# Altium PCB LEOPARD_HD4.PcbDoc (part 3 of 3)
Units mil, origin at the board's own origin, x right, y up, seen from the top; angles counter-clockwise.
Board outline 2678.03 x 1898.03 mil, 4 copper layers (L1, L2, L3, L4), stack 207.302 mil thick; 147 components, 116 nets, 618 pads, 284 vias.
Unrouted connection lines stored in the file: 3.
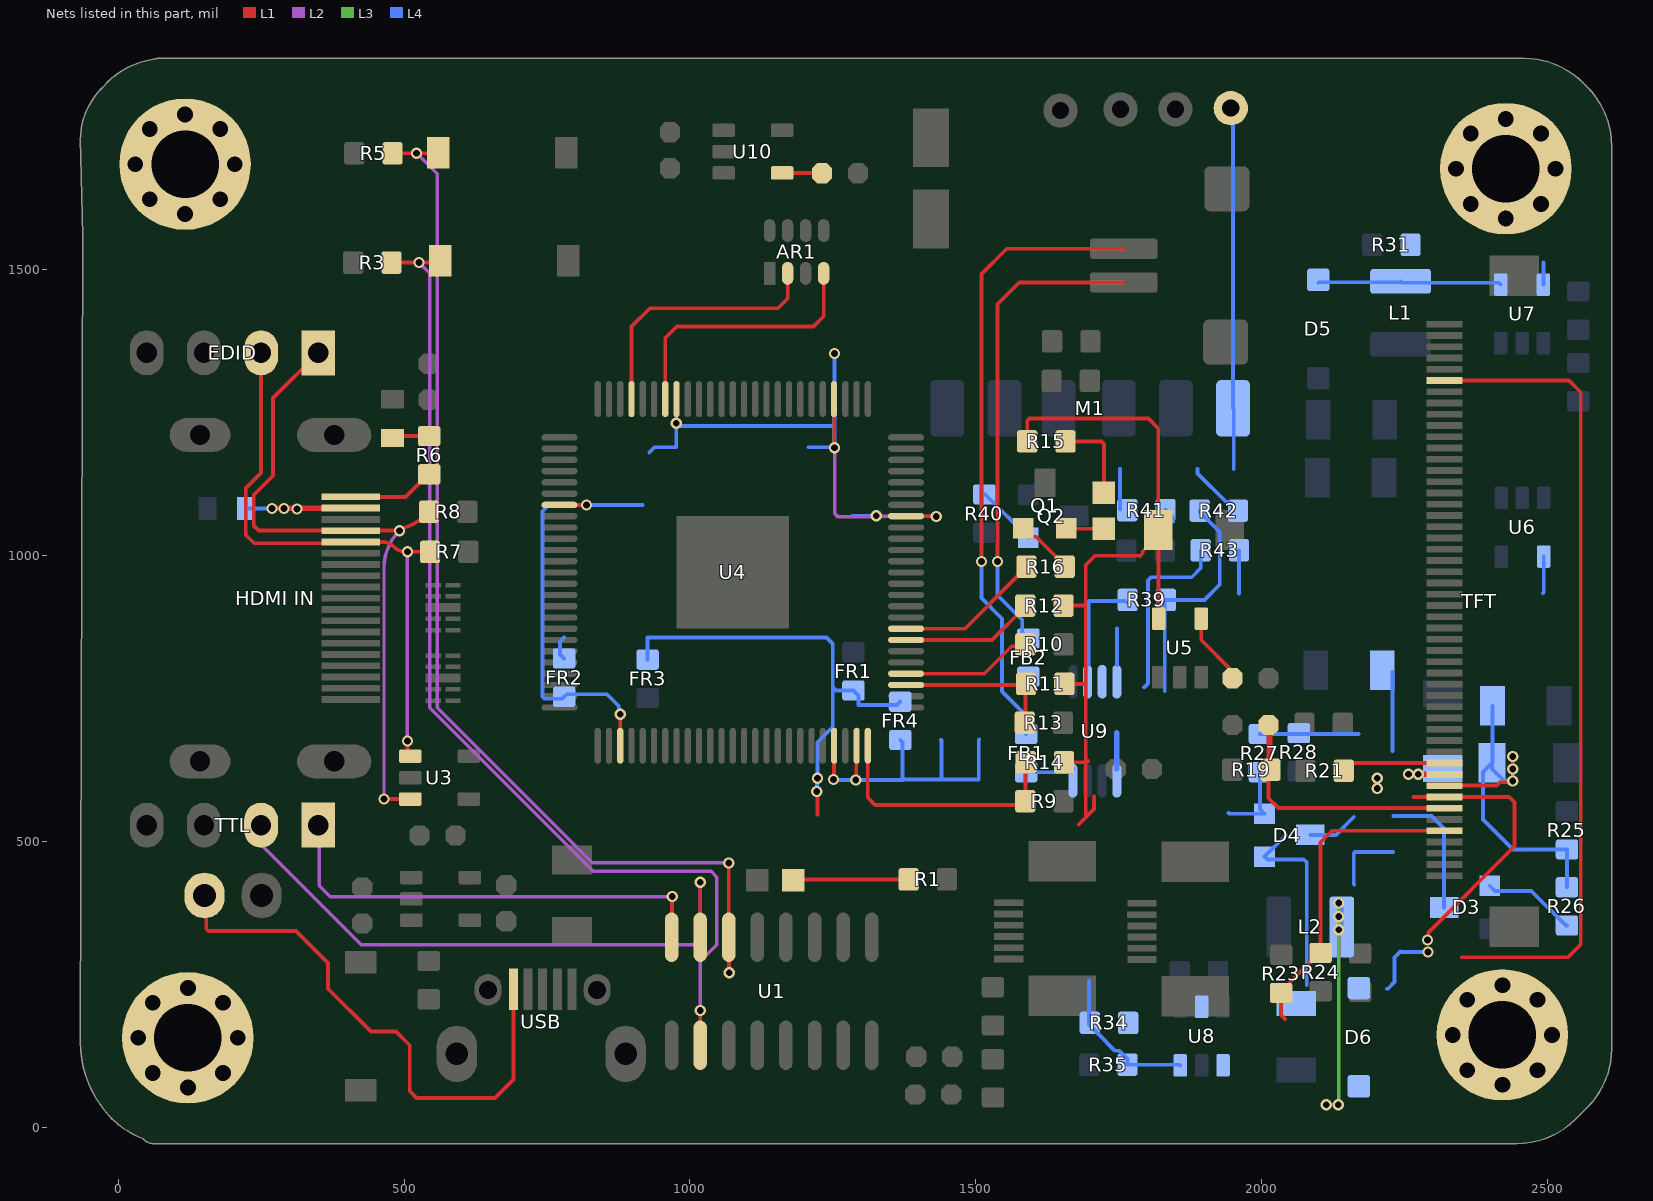
[diagram p5: the nets of this part, all layers, seen from the top]

## Via types
v1: diameter 19.68, hole 11.81, L1 to L4, tented both sides, 252 vias
v2: diameter 39.37, hole 27.56, L1 to L4, tented both sides, 32 vias

## Nets (pads, with @x,y where several pads share a name; then routed paths per layer and width w, separated by ;. In a path a pad name is that pad's centre, name@x,y a point inside that pad or via, vN(x,y) a via of type N, cw(c..) or ccw(c..) an arc to the next point about the centre after c; other vN are vias at no path point) (continued)
NetC13_1: C13.1 C14.1 C15.1 C16.1 C17.1 FR2.2 U4.18 U4.29 U4.43 U4.57 U4.78 | length 1874.3
  L1 w6.64: U4.57@771.85,1088.11 772.04,1087.92 819.08,1087.92 v1(819.28,1087.72) ; v1(878,722) 878.07,721.93 878.07,666.92 U4.78@878.15,666.85 ; v1@976,1226 976.29,1226.29 U4.43@976.29,1272.86 ; U4.29@1252.17,1273.15 1252.55,1272.76 1252.55,1188.45 v1(1253,1188) ; U4.18@1378.15,1068.43 1378.36,1068.21 1430.79,1068.21 v1(1431,1068)
  L2 w6: v1(1253,1188) 1253,1073 1259,1067 1324,1067 v1(1326,1069) 1326.5,1068.5 1430.5,1068.5 v1(1431,1068)
  L4 w6.64: v1(878,722) 875.5,724.5 875.5,736.5 C16.1@855,757 784.46,757 FR2.2@780,752.54 776.46,749 745.89,749 742,752.89 742,1077 752.72,1087.72 v1(819.28,1087.72) 858.71,1087.72 C17.1@859,1088.01 917.01,1088.01 ; 929,1179.99 938,1188.99 C14.1@976,1188.99 v1@976,1226 ; v1(976,1230.99) v1@976,1226 ; C15.1@1207,1188.99 1252.01,1188.99 v1(1253,1188) 1253,1226 ; v1(1253,1353) 1253,1226 ; C13.1@1284,1069 v1(1326,1069) ; v1@976,1226 1253,1226
NetC18_1: C18.1 C23.1 C24.1 C25.1 C26.1 FR4.2 U4.97 U4.99 | length 586
  L1 w6.64: v1@1252.08,608 1252.08,666.77 U4.97@1252.16,666.85 ; v1@1290.77,606 1290.77,666.08 U4.99@1291.53,666.85
  L4 w6.64: v1(1251,608) 1252.01,606.99 C18.1@1372,606.99 1372,608 ; FR4.2@1368,677.07 1372,673.07 1372,608 ; C26.1@1439,677.01 1440,676.01 C25.1@1440,608 ; C24.1@1506,678.01 1505,677.01 C23.1@1505,608 C25.1@1440,608 ; 1372,608 C25.1@1440,608
  other v1: 1290,607
NetC29_1: C29.1 U5.4 | length 126.8
  L1 w6.64: U5.4@1894.4,889.18 1894.4,851.6 1949,797 C29.1@1949,785
NetC33_1: C33.1 U6.4 | length 64.4
  L4 w6.64: C33.1@2492,934 2493.4,935.4 U6.4@2493.4,997.82
NetC37_2: C37.2 D3.1 R26.1 | length 163.8
  L4 w6.64: D3.1@2399,422 2408,413 2471.57,413 2532.03,352.54 R26.1@2534,352.54
NetC38_2: C38.2 D4.2 R27.2 | length 139.3
  L4 w6.64: C38.2@1942,549 1943,548 D4.2@2005,548 1997,556 R27.2@1997,620.54
NetC40_1: C40.1 C41.2 D6.2 L2.2 U8.1 | length 522.8
  L3 w6: v1(2134,39) 2134.5,39.5 2134.5,391.5 v1(2135,392)
  L4 w6.64: v1(2135,392) 2140.12,386.88 L2.2@2140.12,350 ; 2162,424 2161,425 C41.2@2161,479 2163.01,481.01 C40.1@2230,481.01
  other v1: 2113,39 2135,345 2135,368
NetC40_2: C40.2 D3.3 | length 236.1
  L4 w6.64: C40.2@2230,544 2297,544 2319,522 D3.3@2319,384
NetC41_1: C41.1 D4.3 | length 88.8
  L4 w6.64: D4.3@2085,511 2130.01,511 C41.1@2161,541.99
NetC46_1: C46.1 R34.1 R35.2 U8.3 | length 271.9
  L4 w6.64: C46.1@1698,256 1698,179 1712.64,164.35 1743.76,133.24 1751.07,133.24 1765.46,118.84 R35.2@1765.46,109 1856.42,109 U8.3@1857.6,107.82
NetC50_1: C50.1 R41.1 | length 71.2
  L4 w6.64: C50.1@1752.01,1151 1752.01,1080.53 R41.1@1752.54,1080
NetC51_1: C51.1 R39.2 U9.2 | length 177.1
  L4 w6.64: 1697,809.06 1697,918.01 C51.1@1698.99,920 1761.54,920 R39.2@1763.54,918
NetC52_1: C52.1 R42.1 | length 101.3
  L4 w6.64: C52.1@1888.01,1151 1888.01,1142.96 1937.91,1093.06 1944.15,1093.06 1950,1087.21 R42.1@1950,1079
NetC55_1: C55.1 U10.4 | length 70.1
  L1 w6.64: U10.4@1161.18,1668.6 1230.41,1668.6 C55.1@1231.01,1668
NetD5_2: D5.2 L1.1 U7.1 | length 322.5
  L4 w6.64: D5.2@2099,1476.53 2100.05,1477.58 2241.46,1477.58 L1.1@2243,1479.12 2245.63,1476.49 2414.88,1476.49 U7.1@2418,1473.36
"NetHDMI IN1_18": "HDMI IN.18" J2.1 | length 183.5
  L1 w6.64: v1(269,1082) v1@269.23,1082.23 ; 406.82,1082.23 407.05,1082.46
  L1 w10: v1@269.23,1082.23 406.82,1082.23
  L4 w6.64: J2.1@223.75,1082 v1(269,1082)
  other v1: 313,1081 290,1082
"NetHDMI IN1_19": "HDMI IN.19" R6.1 | length 153.3
  L1 w6.64: 407.05,1102.14 502.64,1102.14 542.03,1141.54 R6.1@544,1141.54
NetJ1_2: J1.2 R6.2 | length 66
  L1 w6.64: J1.2@480,1205.25 483.21,1208.46 R6.2@544,1208.46 R6.2@543.54,1208
NetLD1_2: LD1.2 R1.1 | length 202
  L1 w6.64: LD1.2@1180.99,432 1181.99,433 R1.1@1382.54,433
NetLD2_1: LD2.1 R15.2 | length 154.3
  L1 w6.64: R15.2@1656.93,1199 1720.11,1199 1724,1195.11 LD2.1@1724,1109.5
NetLD2_2: LD2.2 Q1.E | length 66.2
  L1 w6.64: Q1.E@1658,1047 1658.5,1046.5 LD2.2@1724,1046.5
NetQ1_B: Q1.B R16.2 | length 101.4
  L1 w6.64: Q1.B@1583,1047 1597.68,1032.32 1605.12,1032.32 1655.46,981.97 R16.2@1655.46,980
NetQ2_1: Q2.1 R40.2 | length 108.3
  L4 w6.64: R40.2@1515,1106.46 1516.54,1106.46 Q2.1@1592,1031
NetR31_1: R31.1 U7.3 | length 38.4
  L4 w6.64: U7.3@2492.8,1473.36 2492.8,1511.8
NetR39_1: R39.1 R42.2 U9.3 | length 404.7
  L4 w6.64: 1830.46,762.46 R39.1@1830.46,918 ; R39.1@1832.46,922 1900,922 1926.75,948.75 1926.75,1040.82 1891.54,1076.03 R42.2@1891.54,1078
NetR41_2: R41.2 R43.1 U9.4 | length 411.9
  L4 w6.64: U9.4@1747,808.28 1747,872 ; 1794,769 1801,776 1801,956 1806.68,961.68 1877.68,961.68 1893.28,977.28 R43.1@1893.28,1008.73 ; R41.2@1832,1079 1845.22,1065.78 1845.22,1058.76
NetUSB_1: USB.1 VCC_USB.1 | length 927.2
  L1 w6.64: VCC_USB.1@154,370 154,346.89 157.89,343 311,343 367,287 367,242 442,167 486,167 510,143 510,63 522,51 659,51 691.23,83.23 USB.1@691.23,241
OCK_INV: R9.2 R14.1 U4.100 | length 443
  L1 w6.64: U4.100@1311.22,666.85 1311.22,575.78 1324,563 1579.54,563 R9.2@1586.54,570 1587.04,570.5 1587.04,637.5 R14.1@1587.54,638
ODCK: AR1.4 U4.44 | length 474.6
  L1 w6.64: U4.44@956.89,1273.15 956.89,1379.89 977,1400 1216,1400 1233.99,1417.99 AR1.4@1233.99,1493
PIXS: R10.2 U4.4 | length 229.6
  L1 w6.64: U4.4@1378.15,792.84 1514.84,792.84 1562.75,840.75 1583.29,840.75 R10.2@1586.54,844
RIGHT: C52.2 M1.6 pad.2 | length 649.4
  L4 w6.64: pad.2@1950,1800 M1.6@1950,1257 1951,1256 C52.2@1951,1151
RST_LCD: C30.2 R19.2 TFT.44 | length 522.1
  L1 w6.64: R19.2@2015.46,625 2015.46,699.54 C30.2@2012,703 2012,575 2029.27,557.73 TFT.44@2319.54,557.73
RST_MCU: R5.2 RST.1 U1.6 | length 1880.1
  L1 w6.64: R5.2@479.93,1703 v1(522,1703) 559,1703 RST.1@560,1704 ; v1(1068,462) U1.6@1068,331.98 1068.5,331.48 1068.5,270.5 v1(1069,270)
  L2 w6: v1(522,1703) 558,1667 558,733 829,462 v1(1068,462)
RX_MCU: TTL.1 U1.8 | length 803.1
  L1 w6.64: U1.8@968,331.98 968.5,332.48 968.5,402.5 v1(969,403)
  L2 w6: TTL.1@350,528 352,526 352,422 371,403 v1(969,403)
SCDT: R16.1 U4.8 | length 256.1
  L1 w6.64: U4.8@1378.15,871.57 1480.98,871.57 1573.04,963.63 1573.54,963.63 1588.54,978.63 R16.1@1588.54,980
SCL: "HDMI IN.15" EDID.2 R7.1 U3.1 | length 1023.2
  L1 w6.64: EDID.2@250,1354 250,1144 223,1117 223,1036 238,1021 404.65,1021 407.05,1023.4 461.72,1023.4 cw(c461.72,994.72) 482,1015 ccw(c503.73,1036.73) 503.73,1006 v1(506,1006) R7.1@545.54,1006 ; v1(506,675) 506,653.22 U3.1@510.82,648.4
  L2 w6: v1(506,675) v1(506,1006)
SDA: "HDMI IN.16" EDID.1 R8.1 U3.3 | length 1190.9
  L1 w6.64: EDID.1@350,1354 271,1275 271,1139 237,1105 237,1052 245.91,1043.09 407.05,1043.09 469.21,1043.09 ccw(c469.21,1143.09) 539.92,1072.38 R8.1@543.54,1076 ; v1(465,573.6) U3.3@510.82,573.6
  L2 w6: v1(465,573.6) 465,977.69 cw(c557.5,977.69) v1(492.09,1043.09)
SHIELD: H1.P H2.P H3.P H4.P
  other v2: 122,69 2421,74 60.48,94.48 183.52,94.48 2359.48,99.48 2482.52,99.48 35,156 209,156 2334,161 2508,161 60.48,217.52 183.52,217.52 2359.48,222.52 2482.52,222.52 122,243 2421,248 2427,1589 117,1597 2365.48,1614.48 2488.52,1614.48 55.48,1622.48 178.52,1622.48 2340,1676 2514,1676 30,1684 204,1684 2365.48,1737.52 2488.52,1737.52 55.48,1745.52 178.52,1745.52 2427,1763 117,1771
SP1+: FB2.2 | length 843.6
  L1 w6.64: v1(1538,989) 1538,1439 1576,1477 1759,1477
  L4 w6.64: v1(1538,989) 1538,930 1581.24,886.76 1581.24,865.22 FB2.2@1592,854.46
SP1-: FB1.2 | length 1104.1
  L1 w6.64: v1(1510,989) 1510,1492 1554,1536 1759,1536
  L4 w6.64: v1(1510,989) 1510,925 1546,889 1546,762 1588,720 FB1.2@1588,687.46
SPK1+: FB2.1 R43.2 U9.5 | length 137.3
  L4 w6.64: 1960.21,933.21 R43.2@1960.21,1008.73
  L4 w10: U9.5@1746.38,627.21 1746.38,689
SPK1-: FB1.1 U9.8 | length 85.8
  L4 w6.64: FB1.1@1588,620.54 1665.44,620.54 1670,625.09 U9.8@1670,627
ST: R11.1 R13.2 U4.3 | length 277.9
  L1 w6.64: U4.3@1378.15,773.15 1586.15,773.15 R11.1@1588,775 ; R13.2@1585.54,707 1586.77,708.23 R11.1@1586.77,773.77
STAGE: R12.2 U4.7 | length 240.2
  L1 w6.64: U4.7@1378.15,851.89 1528.39,851.89 1586.54,910.03 R12.2@1586.54,912 R12.2@1582.43,907.89
SW1: OFF/ON.2 R3.2 U1.10 | length 1810.8
  L1 w6.64: R3.2@477.93,1512 v1(526,1512) 567,1512 OFF/ON.2@570,1515 ; U1.10@1018,143 v1(1018,204)
  L2 w6: v1(526,1512) 545,1493 545,733 831,447 1037,447 1047,437 1047,319 1018,290 v1(1018,204)
TX_MCU: TTL.2 U1.7 | length 1073.1
  L1 w6.64: U1.7@1018,331.98 v1(1018,428)
  L2 w6: TTL.2@250,494 425,319 1007,319 1018,330 v1(1018,428)
  L2 w6.64: TTL.2@250,494 TTL.2@250,528
U/D: R21.1 TFT.40 | length 181.7
  L1 w6.64: R21.1@2143.46,623 2156.94,636.47 TFT.40@2319.54,636.47
VCC10.4: C46.2 C47.1 C48.1 D4.1 D6.1 R34.2 TFT.43 U8.5 | length 953.6
  L1 w6.64: 2265.58,577.42 TFT.43@2319.54,577.42 2432.58,577.42 2442,568 2442,491 2291.51,340.51 2291.51,328.51 v1(2290,327)
  L4 w6.64: 2042,510 D4.1@2005,473 2010,468 2073.73,468 2079,462.73 2079,248.36 ; 2219,242 2220.73,242 2232.36,253.64 2232.36,296.36 C47.1@2243,307 2244,306 v1(2291,306)
  other v1: 2202,592 2202,610
VCC16: C36.2 C39.1 DZ2.2 R27.1 R28.2 TFT.41 | length 373.1
  L1 w10: v1(2257,617) 2257.11,616.89 2319.44,616.89 TFT.41@2319.54,616.79
  L4 w6.64: R27.1@1997,687.46 2169.54,687.46 ; 2228.87,657.87 C39.1@2228.87,795.81
  other v1: 2274,617
VCC-7: C34.2 C35.2 DZ1.1 R25.2 R26.2 TFT.42 | length 661.9
  L1 w6.64: TFT.42@2319.54,597.1 2319.99,597.55 2411.16,597.55 2416.56,602.96 2436.96,602.96 v1(2439,605) ; v1(2439,626) v1(2439,648)
  L4 w6.64: C35.2@2403.72,736.81 2403.72,637.72 DZ1.1@2403,637 ; v1(2439,626) v1(2439,605) 2438.13,605.87 2423.3,605.87 2403,626.17 DZ1.1@2403,637 ; R26.2@2534,419.46 R25.2@2534,485.54 2439.46,485.54 2387,538 2387,621 DZ1.1@2403,637
VCOM: R23.2 R24.2 TFT.6 TFT.46 | length 1997.6
  L1 w6.64: 2041,189 2034,196 R23.2@2034,234.54 2035.37,234.54 2049.68,248.85 2049.68,253.11 2101.03,304.46 R24.2@2103,304.46 2103,498 2123.36,518.36 TFT.46@2319.54,518.36 ; TFT.6@2319.54,1305.77 2537.23,1305.77 2558,1285 2558,319 2536,297 2350,297
VDD: C27.1 FR1.1 FR2.1 FR3.1 FR4.1 R11.2 R12.1 R14.2 R15.1 U5.5 | length 2249.5
  L1 w6.64: 1223,546 v1@1223,587 ; R15.1@1590,1199 1590,1235.11 1593.89,1239 1802,1239 1819,1222 C27.1@1819,1044 ; R12.1@1653.46,912 1692.23,912 ; R14.2@1654.46,638 1692.23,638 ; R11.2@1654.93,775 1692.23,775 ; 1680,529 1707,556 1707,578 ; 1692.23,542.23 1692.23,638 ; 1696,640 1694,638 1692.23,638 ; U5.5@1819.6,889.18 1819.6,1043.4 C27.1@1819,1044 ; 1692.23,638 1692.23,775 ; 1692.23,775 1692.23,912 ; 1692.23,912 1692.23,983.23 1708,999 1787,999 1787.25,998.75 1791.94,1003.44 1791.94,1006.94 1819,1034 C27.1@1819,1044
  L4 w6.64: FR2.1@780,819.46 773,826.46 773,849 780,856 ; FR3.1@926,817.46 926,856 1239,856 1250,845 1250,768.81 ; v1(1222,587) 1222.5,587.5 1222.5,609.5 v1(1223,610) 1223,673 1250,700 1250,768.81 ; FR4.1@1368,744 1362,738 1294.89,738 1294.89,754.65 FR1.1@1286,763.54 1255.27,763.54 1250,768.81
VSY: AR1.2 U4.47 | length 464.2
  L1 w6.64: U4.47@897.84,1273.15 897.84,1399.84 930,1432 1154,1432 1171,1449 AR1.2@1171,1493
pads on no net: "HDMI IN.13" "HDMI IN.14" D5.0 D6.0 FB1.0 FB2.0 FR1.0 FR2.0 FR3.0 FR4.0 L1.0 L2.0 M1.1 M1.2 R1.0 R2.0 R3.0 R5.0 R6.0 R7.0 R8.0 R9.0 R10.0 R11.0 R12.0 R13.0 R14.0 R15.0 R16.0 R17.0 R18.0 R19.0 R20.0 R21.0 R22.0 R23.0 R24.0 R25.0 R26.0 R27.0 R28.0 R29.0 R31.0 R32.0 R33.0 R34.0 R35.0 R36.0 R37.0 R38.0 R39.0 R40.0 R41.0 R42.0 R43.0 SPK.1 SPK.2 SPK.3 TFT.45 TFT.49 TFT.50 TFT.51 TFT.52 TP1.7 TP1.8 TP2.7 TP2.8 U2.0 U3.0 U4.2 U4.9 U4.40 U4.41 U4.42 U4.49 U4.50 U4.51 U4.52 U4.53 U4.54 U4.55 U4.56 U4.59 U4.60 U4.61 U4.62 U4.63 U4.64 U4.65 U4.66 U4.69 U4.70 U4.71 U4.72 U4.73 U4.74 U4.75 U4.77 U4.96 U5.0 U6.0 U7.0 U8.0 U10.0 USB.4
copper on no net: | length 29
  L1 w30: 1908,218 1911,218 1919,218 ; 1911,226 1917,226 ; 1933,1373 1937,1373 ; 1935,1641 1939,1641 ; 1939,1631 1940,1631 ; 1939,1654 1942,1654

## Polygon pours and split planes (outlines as drawn)
GND on L4 "GND_L04_P000" (solid, remove dead copper, pour order 0): 2577,1731 2577,130.42 cw(c2477,130.42) 2547.71,59.71 2515.29,27.29 cw(c2444.58,98) 2444.58,-2 97.42,-2 cw(c97.42,98) 26.71,27.29 -30,84 cw(c11.04,125.04) -47,125.04 -47,1717.58 cw(c53,1717.58) -17.71,1788.29 27,1833 cw(c58.38,1801.62) 58.38,1846 2457.58,1846 cw(c2457.58,1746) 2528.29,1816.71 2570,1775 cw(c2553.1,1758.1) 2577,1758.1 2577,1730
GND on L2 "GND_L02_P001" (solid, remove dead copper, pour order 1): 2582,1719.69 2582,119.11 cw(c2482,119.11) 2552.71,48.4 2520.29,15.98 cw(c2449.58,86.69) 2449.58,-13.31 102.42,-13.31 cw(c102.42,86.69) 31.71,15.98 -25,72.69 cw(c16.04,113.73) -42,113.73 -42,1706.27 cw(c58,1706.27) -12.71,1776.98 32,1821.69 cw(c63.38,1790.31) 63.38,1834.69 2462.58,1834.69 cw(c2462.58,1734.69) 2533.29,1805.4 2575,1763.69 cw(c2558.1,1746.79) 2582,1746.79 2582,1718.69
GND on L3 "GND_L03_P002" (solid, remove dead copper, pour order 2): 2570.6,1713.38 2570.6,112.8 cw(c2470.6,112.8) 2541.31,42.09 2508.89,9.67 cw(c2438.18,80.38) 2438.18,-19.62 91.02,-19.62 cw(c91.02,80.38) 20.31,9.67 -36.4,66.38 cw(c4.64,107.42) -53.4,107.42 -53.4,1699.96 cw(c46.6,1699.96) -24.11,1770.67 20.6,1815.38 cw(c51.99,1783.99) 51.99,1828.38 2451.18,1828.38 cw(c2451.18,1728.38) 2521.89,1799.09 2563.6,1757.38 cw(c2546.7,1740.48) 2570.6,1740.48 2570.6,1712.38
GND on L1 "GND_L01_P003" (hatched 45Degree grid 25 track 8, remove dead copper, pour order 3): 2568,1700.69 2568,100.11 cw(c2468,100.11) 2538.71,29.4 2506.29,-3.02 cw(c2435.58,67.69) 2435.58,-32.31 88.42,-32.31 cw(c88.42,67.69) 17.71,-3.02 -39,53.69 cw(c2.04,94.73) -56,94.73 -56,1687.27 cw(c44,1687.27) -26.71,1757.98 18,1802.69 cw(c49.38,1771.31) 49.38,1815.69 2448.58,1815.69 cw(c2448.58,1715.69) 2519.29,1786.4 2561,1744.69 cw(c2544.1,1727.79) 2568,1727.79 2568,1699.69

## Keep-outs
Keep-Out Layer:
  lines w5: -60,1698.45 cw(c105.18,1696.2) 115.1,1861.1 2441.35,1861.1 cw(c2439.1,1695.92) 2604,1686 ; -59,140.45 -59,1699.45 ; -59,155.45 ccw(c105.9,145.53) 103.65,-19.65 ; 103.65,-19.1 2349.1,-19.1 2408.1,-19.1 cw(c2408.2,-19.1) 2408.2,-19 2429,-19 ccw(c2438.92,145.9) 2604.1,143.65 2604.1,1692.1

## Other copper
L1:
  rectangle net 3V3M: 1437,362 1481,382
  rectangle net GND: 1962,1374 1990,1391
  rectangle net GND: 1883,1362 1921.89,1384
  rectangle net GND: 1812.14,202 1840,247.73
  rectangle net GND: 1861.42,179 1928,232.48
  rectangle net GND: 1635,415 1662,452
  rectangle net GND: 1868,414 1900,454
  rectangle net GND: 1576,449 1959,476
  rectangle net GND: 1921.89,1362 1947,1425.69
  rectangle net GND: 1928,1586 1952,1693
  rectangle net GND: 1884.34,1628 1993,1661.11
  rectangle net GND: 2423,1439 2459,1538
  rectangle net GND: 2384,1470 2500,1507
  rectangle net 3V3M: 1254,0 1409,191
  rectangle net SW1: 453,1478 612,1557
  rectangle net RST_MCU: 454.58,1655 613,1742.06
  rectangle net "NetHDMI IN1_18": 257,1057 345,1110
  rectangle net NetC40_1: 2122,334 2149,407
  rectangle net NetC40_1: 2066,23 2225,79
  rectangle net VDD: 1636,623 1699,653
  rectangle net NetLD2_2: 1634,1027 1746,1070
  rectangle net VDD: 1635.75,891 1707,939.56
  rectangle net VDD: 1641.15,755 1692,798.62
  rectangle net 5.0V: 2015,291.62 2053.69,408
  region net 3V3M: 1800,375 1824,375 1830,381 1876,381 1981,276 1981,186 2044,123 2044,8 2028,-8 1552.81,-8 1552.81,74 2014,74 2025,85 2025,120 1967,178 1967,259 1863,363 1827,363 1821,369
  region net 5.0V: 214,467 214,378 227,365 360,365 394,399 450,399 450,435 413,472 219,472
  region net NetUSB_1: 109,357 133,333 299,333 347,285 347,148 390,105 468,105 487,86 487,44 513,18 685,18 707,40 707,195 694,208 689,208 679,198 679,95 644,60 549,60 526,83 526,171 491,206 404,206 381,229 381,311 344,348 215,348 192,371 192,453 180,465 113,465 109,461
  region net 3V3M: -49,364 -49,338 -7,296 231,296 287,240 287,46 345,-12 1556,-12 1565,-3 1565,61.81 1552.81,74 1515.06,74 1506.38,65.32 1508,63.69 1508,20 1497,9 1424,9 1416,17 1416,148 1425,157 1546,157 1550,161 1550,187 1546,191 1395,191 1360.5,156.5 1360.5,17.5 1346,3 408,3 335,76 335,272 289,318 78,318 37.4,358.6
  region net 4.2V: 1138,1799 1138,1720 1146,1712 1348,1712 1396,1664 1653,1664 1684,1695 1684,1799 1663,1820 1159,1820
  region net 5.0V: 1078,1804 1102,1804 1119,1787 1119,1657 1106,1644 1044,1644 1037,1651 1037,1677 1041,1681 1095,1681 1099,1685 1099,1715 1086,1728
  region net 5.0V: 809,1459 830,1459 852,1481 852,1753 903,1804 1078,1804 1100.6,1781.4 1100.6,1742.6 1086,1728 944,1728 913,1697 913,1468 846,1401 835,1390
  region net 3V3M: 833,1816 833,1493 819,1479 742,1479 732,1489 732,1755 705,1782 375,1782 330,1737 330,1531 289,1490 17,1490 -17,1456 -17,661 83.1,560.9 83.1,296 -34,296 -49,311 -49,1491 -10,1530 227,1530 295,1598 295,1801 326,1832 817,1832
  region net 3V3M: 594,447 594,427 603,418 637,418 641,422 641,443 655,457 734,457 761,430 859,430 886,403 886,271 930,227 1222,227 1254,195 1254,81 1261,74 1279,74 1292,87 1292,186 1238,240 959,240 911,288 911,460 836,535 682,535
  region net 5.0V: 408,407 416,399 450,399 471,420 539,420 545,414 545,376 541,372 494,372 487,365 487,342 494,335 566,335 581,350 581,455 613,487 605,495 569,495 546,472 413,472 408,467 413,472 408,467
  region net 5.0V: 596.65,1128.35 713,1012 713,587 613,487 577,487 569,495 569,574 584,589 630,589 685,644 685,951 596.77,1039.23
  region net 5.0V: 1783,807 1783,827 1796,840 1886,840 1908,818 1908,768 1904,764 1886,764 1882,768 1882,809 1869,822 1840,822 1831,813
  region net VDD: 1571,1237 1571,1183 1576,1178 1577.31,1179.31 1607.72,1179.31 1614,1185.6 1614,1216 1627,1229 1743,1229 1769,1203 1769,1022 1757,1010 1701,1010 1681,990 1681,531 1710,560 1710,858 1720,868 1721,867 1828,867 1828,1000 1849,1021 1849,1230 1831,1248 1582,1248
  region net VCC10.4: 2174,585 2187,572 2303,572 2303,582 2302,583 2274,583 2251,583 2213,621 2176,621 2174,619
  region net 3V3L: 2148.38,250.32 2148.38,218.62 2158,209 2243,209 2329,295 2329,308 2321,308 2267.25,254.25 2152.31,254.25
  region net 3V3L: 2367,1233 2374,1226 2419,1226 2458,1265 2494,1265 2515,1244 2515,529 2388,402 2520,402 2546,428 2546,1277 2528,1295 2370,1295 2367,1292
  region net 5.0V: 561,1307 645.11,1307 664,1288.11 664,984 600.31,984 595,989.31 595,1225 569,1251
  region net 5.0V: 13,1412 13,1330 32,1311 68,1311 91,1334 91,1393 114,1416 418,1416 460,1374 460,1257.75 466.75,1251 569,1251 576,1258 576,1292 561,1307 516,1307 499,1324 499,1388 502,1391 503,1390 835,1390 835,1459 60,1459
  region net VDD: 1207,548 1238,517 1689,517 1710,538 1710,560 1702,560 1674,532 1257,532 1233,556 1233,617 1228,622 1209,622 1207,620
  region net 5.0V: 1831,813 1831,568 1849,550 2010,550 2067,493 2067,297.06 2051.94,282 2024.62,282 2010,296.62 2010,482 1971,521 1810,521 1783,548 1783,807 1792,816 1828,816
  region net SP1+: 1825,1462 1819,1456 1574,1456 1547,1429 1547,984 1543,980 1531,980 1528,983 1528,1456 1576,1504 1814,1504 1825,1493
  region net SP1-: 1826,1559 1826,1527 1816,1517 1563,1517 1521,1475 1521,984 1517,980 1504,980 1501,983 1501,1502 1560,1561 1824,1561
  region net 4.2V: 1842,979 1842,960 1848,954 1917,954 1935,936 1935,834 1940,829 1963,829 1969,835 1969,972 1953,988 1851,988
  region net BL_VCC: 2220,1405 2246,1379 2370,1379 2384,1393 2384,1413 2376,1421 2300,1421 2281,1440 2281,1678 2272,1687 2223,1687 2220,1684
  region net BL_GND: 2304,1370 2237,1370 2208,1399 2208,1673 2205,1676 2159,1676 2155,1672 2155,1651 2163,1643 2174,1643 2180,1637 2180,1314 2184,1310 2254,1310 2258,1314 2258,1336 2262,1340 2304,1340
  region net VCOM: 2010.38,248.32 2010.38,191.62 2027,175 2240,175 2365,300 2348,300 2235,187 2065,187 2053,199 2053,246.37 2047.37,252 2014.06,252
  region net VCC-7: 2350,603 2378,603 2393,618 2393,660 2405,672 2452,672 2457,667 2457,599 2449,591 2350,591
  region net VCC10.4: 2260,308 2272,296 2294,296 2310,312 2310,349 2461,500 2461,567 2445,583 2350,583 2350,572 2406,572 2424,554 2424,488 2334,398 2265,398 2260,393
L2:
  rectangle net 5.0V: 2005,329 2063,420
  rectangle net VCC10.4: 2257,270 2324,351
  rectangle net VCC-7: 2411,575 2469,675
  rectangle net VCC16: 2236,582 2292,645
  rectangle net VCC10.4: 2179,566 2226,636
  rectangle net NetC40_1: 2087,20 2157,55
  rectangle net NetC40_1: 2121,333 2149,410
  rectangle net 3V3L: 2349,1208 2414,1299
  rectangle net BL_GND: 2175,1290 2250,1331
  region: 1053,1172.76 923,1172.76 923,848 1347.84,848 1347.84,812 897,812 897,871.16 800,871.16 800,917 895,917 895,1206 1053,1206
  region net 3V3M: 1481,365 1475,359 1437,359 1430,366 1430,395 1433,398 1480,398 1481,397
  region net BL_VCC: 2281,1442 2304,1419 2393,1419 2393,1378 2384,1378 2256,1378 2235,1399 2235,1663 2241,1669 2279,1669 2281,1667
  region net 4.2V: 1835,993 1872,993 1969,896 1969,832 1961,824 1935,824 1928,831 1928,860 1833,955 1833,991
L3:
  rectangle net VCC10.4: 2261,275 2320,357
  rectangle net 5.0V: 2004,312 2060,415
  rectangle net VCC16: 2236,565 2297,650
  rectangle net VCC10.4: 2173,564 2227,650
  rectangle net VCC-7: 2412,572 2472,676
  rectangle net 3V3L: 2363,1222 2405,1298
  rectangle net BL_VCC: 2353,1388 2389,1422
  region net NetC40_1: 2177,407 2177,38 2159,20 2097,20 2089,28 2089,415 2095,421 2173,421 2177,418
  region net 4.2V: 1959,830 1947,818 1821,818 1810,829 1810,1000 1825,1015 1956,1015 1959,1012 1956,1015 1959,1012
L4:
  rectangle net NetC46_1: 1681,161.04 1715.96,277
  rectangle net NetC8_1: 1015,1164 1168,1207
  rectangle net EN_BLK: 1838,191 1870,290
  rectangle net 4.2V: 1615,1203 1684,1819
  rectangle net LEFT: 1818,1309 1884,1819
  rectangle net RIGHT: 1909,1257 1980,1819
  rectangle net NetC46_1: 1747.75,71 1873,136.56
  rectangle net VCC10.4: 1884,160 1907,232
  rectangle net BL_VCC: 2227,1583 2283,1818
  rectangle net BL_GND: 2153,1515.44 2215,1818
  rectangle net NetC33_1: 2476,912 2522,1025
  region net NetR31_1: 2339.04,1521 2465,1521 2479,1507 2479,1457 2481,1455 2504,1455 2504,1509 2470,1543 2335.34,1543
  region net 5.0V: 213,448 213,342 262,293 322,293 347,268 347,50 406,-9 2246,-9 2268.67,13.67 565.33,13.67 495,84 495,405 442,458 223,458
  region net 3V3M: 1481,399 1481,362 1478,359 1432,359 1427,364 1427,398 1433,404 1478,404 1481,401
  region net NetC13_1: 994,1242 1221,1242 1243,1264 1243,1357 1249,1363 1261,1363 1264,1360 1264,1178 1251,1165 1192,1165 1187,1170 1187,1210 1182,1215 1001,1215 992,1206
  region net NetC13_1: 872,1109 897,1109 906,1118 906,1219 929,1242 994,1242 1000,1236 1000,1166 991,1157 958,1157 930,1129 930,1070
  region net NetC13_1: 888,765 888,711 878,701 752,701 733,720 733,1091 751,1109 920,1109 930,1099 930,1070 910,1050 771,1050 749,1028 749,789.44 762.44,776 877,776
  region net NetC8_1: 1193,926 1193,885 1201,877 1255,877 1266.31,865.69 1266.31,816.69 1274,809 1336,809 1352,825 1352,893 1317,928 1195,928
  region net NetC18_1: 1241,598 1256,583 1515,583 1527,595 1527,686 1516,697 1289,697 1241,649 1241,628
  region net VDD: 761,859 761,803 764,800 765,801 806.81,801 816,810.19 816,832 833,849 879,849 902,826 902,804.06 908.06,798 951.81,798 958,804.19 958,833 974,849 1232,849 1245,836 1245,712 1210,677 1210,583 1216,577 1228,577 1234,583 1234,655 1299,720 1381.4,720 1391.62,730.22 1391.62,784.38 1383,793 1262.44,793 1256,799.44 1256,853 1246,863 765,863
  region net AVDD: 1234,778 1234,717 1215,698 918,698 907,709 907,764 912,769 912.75,768.25 979.25,768.25 991,780 1232,780
  region net "NetHDMI IN1_18": 204,1141 204,1046 209,1041 332,1041 338,1047 338,1137 329,1146 209,1146
  region net 5.0V: 16,1059 34,1041 167,1041 167,1139 160,1146 106,1146 76,1176 76,1399 19,1399 16,1396
  region net 5.0V: 1909.69,294.62 1909.69,252.32 1921,241 1921,190 1922,190 1925,187 1969,187 1984,202 1984,262 2002,280 2006,276 2035,276 2050,291 2050,310 2042,318 2021,297 1912.06,297
  region net 5.0V: 1944,442 1955,442 1982,415 2040.67,415 2051,404.67 2051,301 2049,299 2047,301 2010,301 2010,334 2001,343 1946,343
  region net 5.0V: 1916,442 1944,442 1957,429 1957,342 1944,329 1915,329 1907,337 1907,406 1894,419
  region net NetR31_1: 2242.75,1570.56 2286,1571 2333.04,1571 2361.04,1543 2339.04,1521 2248.31,1521 2246.69,1519.38 2242.75,1523.31
  region net SP1-: 1499,890 1551,838 1557,844 1557,884 1520,921 1520,995 1515,1000 1500,1000 1499,999
  region net SP1+: 1526,999 1526,929 1572,883 1572,840 1580,832 1614.81,832 1625,842.19 1625,866 1567,924 1567,987 1554,1000 1527,1000
  region net SP1-: 1569,761 1557,773 1557,884 1547,894 1547,761
  region net SP1-: 1616,670.19 1608.81,663 1567.19,663 1555,675.19 1555,685 1567.19,697.19 1567.19,735.81 1542,761 1569,761 1616,714 1616,706
  region net SPK1-: 1678,668 1678,578 1660,560 1573,560 1563,570 1563,639 1569,645 1628,645 1652,669 1677,669
  region net NetC38_2: 2024,634.32 2024,531 2022,529 1935,529 1923,541 1923,616 1941.32,634.32
  region net 4.2V: 1714,599 1714,545 1703,534 1703,502 1723,482 1835,482 1862,509 1862,645 1966,749 1966,867 1959,874 1935,874 1927,866 1927,749 1842,664 1842,570 1841,570 1803,532 1742,532 1729,545 1729,604
  region net 4.2V: 1615,1177.5 1712,1080.5 1712,1141 1684,1169 1684,1335 1670,1349 1619,1349 1615,1345
  region net NetC51_1: 1783.25,949.56 1783.25,902.31 1776.94,896 1726,896 1698,868 1682,884 1682,942 1700,960 1772.81,960
  region net CTRL: 1786,1021 1786,985.19 1773.81,973 1693,973 1673,953 1668,953 1668,1030 1647,1051 1647,1088 1651,1092 1691,1092 1695,1088 1697,1088 1697,1067 1696,1066 1696,1034 1701,1029 1778,1029
  region net NetR41_2: 1814.28,1106.56 1814.28,1051.44 1822.72,1043 1848,1043 1888,1003 1888,987 1866,965 1810,965 1798,953 1798,948.56 1802.44,953 1888,953 1910,975 1910,1021.54 1901.54,1030 1875,1030 1851,1054 1851,1099 1843,1107 1814.72,1107
  region net NetR41_2: 1739,758 1745,752 1792,752 1805,765 1805,909 1778,882 1743,882 1739,878
  region net NetR39_1: 1714,774 1714,736 1720,730 1840,730 1872,762 1872,877 1931,936 1931,982 1892,943 1820,943 1814,937 1814.75,936.25 1814.75,754.72 1802.03,742 1733,742 1728,747 1728,774
  region net SPK1+: 1979,942 1912,875 1912,752 1841,681 1663,681 1572.31,771.69 1572.31,810.31 1576,814 1602.94,814 1624,792.94 1624,742 1671,695 1837,695 1898,756 1898,881 1941,924 1941,1026.92 1947.08,1033 1976,1033 1979,1030
  region net NetR39_1: 1868,1060 1887,1041 1909,1041 1926,1024 1931,1024 1931,1048 1910,1069 1910,1096.94 1904.94,1102 1872,1102 1868,1098
  region net NetC52_1: 1868,1172 1868,1120 1879,1109 1911,1109 1936,1084 1936,1064 1944.69,1055.32 1944.69,1054.38 1971.62,1054.38 1972,1054 1976,1058 1976,1100 1971,1105 1945,1105 1912,1138 1912,1164 1900,1176 1872,1176
  region net RIGHT: 1976,1318 1976,1135 1968,1127 1938,1127 1928,1137 1928,1196 1910,1214 1910,1305 1923,1318
  region net LEFT: 1884,1205 1838,1159 1838,1135 1825,1122 1798,1122 1791,1129 1791,1166 1818,1193 1818,1309 1825,1316 1882,1316 1884,1314
  region net NetC50_1: 1724,1070 1738,1056 1778.23,1056 1778.85,1055.38 1787,1063.53 1787,1102.35 1773,1116.35 1773,1169 1767,1175 1728,1175 1724,1171
  region net 5.0V: 2565,577 2565,534 2578,521 2578,322 2564,308 2354,308 2255,209 2255,161 2264,161 2272,169 2272,208 2354,290 2578,290 2598,310 2598,1137 2582,1153
  region net 5.0V: 1916,442 1638,442 1601,405 1601,0 1608,-7 2248,-7 2272,17 2272,184 2222,134 2222,34 2199,11 1662,11 1638,35 1638,322 1706,390 1895,390 1921,364
  region net VCC10.4: 2035,453 2052,453 2067,438 2067,277 2047,257 2058,246 2116,246 2126,256 2097,285 2097,468 2089,476 2053,476 2041,488
  region net 5.0V: 2593,1142 2593,567 2592,568 2574,568 2565,577 2565,1042 2555,1052 2495,1052 2480,1067 2480,1079
  region net BL_GND: 2277,1304 2264,1291 2199,1291 2182,1274 2182,1113 2160,1091 2065,1091 2065,1184 2119,1184 2141,1206 2141,1308 2171,1338 2273,1338 2277,1334
  region net BL_VCC: 2471,1408 2471,1355 2466,1350 2446,1350 2443,1353 2443,1398 2434,1407 2408,1407 2394,1393 2340,1393 2317,1416 2159,1416 2132,1389 2132,1210 2118,1196 2070,1196 2059,1207 2059,1406 2086,1433 2446,1433
  region net NetC37_2: 2372,450 2372,397 2384,385 2477,385 2508,354 2508,338 2518,328 2554,328 2558,332 2558,373 2551,380 2512.44,380 2487,405.44 2487,436 2468,455 2377,455
  region net VCC-7: 2561.56,503.25 2561.56,409.62 2550.94,399 2517.06,399 2502,414.06 2502,443 2475,470
  region net VCC10.4: 2315,338 2315,294 2244,223 2221,246 2221,328 2233,340 2313,340
  region net NetC40_2: 2205,563 2205,527 2213,519 2264,519 2291,492 2291,365 2294,362 2337,362 2343,367 2343,447 2343,451 2343,458 2343,545 2318,570 2212,570
  region net NetC40_1: 2259,499 2259,467 2242,450 2211,450 2197,436 2114,436 2114,461 2158,505 2253,505
  region net NetC41_1: 2184,526 2177,519 2151,519 2121,489 2064,489 2061,492 2061,529 2094,562 2180,562 2184,558
  region net VCC10.4: 2215,613 2215,581 2207,573 2088,573 2048,533 2048,466 2035,453 1989,453 1984,458 1984,506 1992,514 2028,514 2038,524 2038,575 2055,592 2147,592 2177,622 2206,622
  region net VCC16: 2233,735 2268,693 2282,679 2344,679 2357,666 2357,604 2352,599 2258,599 2237.01,619.99
  region net VCC16: 1966,681.06 1979.06,668 2189,668 2250,607 2263,607 2263,834 2246,851 2159,851 2137,829 2137,765 2118,746 1974,746 1966,738
  region net 3V3L: 2393,1073 2433,1033 2433,982 2398,947 2398,903 2409,892 2445,892 2451,886 2451,818 2442,809 2378,809 2348,839 2348,1294 2358,1304 2390,1304 2393,1301
  region net NetD5_2: 2072,1456 2085,1443 2315,1443 2339,1467 2388,1467 2403,1452 2425,1452 2430,1457 2430,1493 2418,1505 2073,1505 2072,1504
  region net EN_BLK: 2481,1352 2483,1350 2510.94,1350 2542.94,1318 2572.94,1318 2581,1326.06 2581,1398.28 2570.28,1409 2485,1409 2481,1405
  region net 5.0V: 2182,1401 2182,1357 2192,1347 2395,1347 2404,1338 2404,1080 2409,1075 2428,1075 2431,1078 2431,1128 2437,1134 2438,1133 2473,1133 2480,1126 2480,1079 2483,1076 2586,1076 2593,1083 2593,1142 2582,1153 2452,1153 2443,1162 2443,1314 2450,1321 2497,1321 2523,1295 2523,1252 2531,1244 2572,1244 2577,1249 2577,1290 2567,1300 2541,1300 2501,1340 2442,1340 2430,1352 2430,1388 2425,1393 2409,1393 2396,1380 2395,1381 2318.48,1381 2292.48,1407 2188,1407
  region net VCC-7: 2561.56,503.25 2561.56,472.56 2555,466 2420,466 2379,507 2379,768 2387,776 2450,776 2465,761 2465,596 2431,562 2431,518 2441,508 2556.81,508
  region net NetC40_1: 2114,436 2114,295 2124,285 2190,285 2199,294 2199,438 2190,447 2125,447
  region net NetC40_1: 1918,132 1918,43 1934,27 2187,27 2208,48 2208,131 2197,142 2153,142 2147,136 2147,69 2138,60 1968,60 1958,70 1958,128 1951,135 1921,135
  region net VCC10.4: 1744,167.06 1757.06,154 2215,154 2243.73,182.73 2243.73,242.27 2221,265 2030,265 2004,239 2004,193 1980,169 1825,169 1806,188 1806,284 1801,289 1746,289 1744,287

## Silkscreen, mask and mechanical layers (free items; w line width, h text height)
Top Overlay:
  drawing of 348 lines, arcs and shapes, not listed
  text "Layer" at -987.42,3919 h60
  text "Name" at -577.51,3919 h60
  text "Material" at 352.23,3919 h60
  text "Thickness" at 1212,3919 h60
  text "Constant" at 1861.84,3919 h60
  text "Board Layer Stack" at 2431.7,3919 h60
  text "Top Overlay" at -577.51,3799 h60
  text "Top Solder" at -577.51,3679 h60
  text "Solder Resist" at 352.23,3679 h60
  text "0.030mm" at 1212,3679 h60
  text "3.5" at 1861.84,3679 h60
  text "1" at -987.42,3559 h60
  text "L1" at -577.51,3559 h60
  text "FR-4" at 352.23,3559 h60
  text "0.030mm" at 1212,3559 h60
  text "Dielectric 2" at -577.51,3439 h60
  text "PP-022" at 352.23,3439 h60
  text "0.102mm" at 1212,3439 h60
  text "4.6" at 1861.84,3439 h60
  text "Dielectric4" at -577.51,3319 h60
  text "FR-4" at 352.23,3319 h60
  text "0.320mm" at 1212,3319 h60
  text "4.8" at 1861.84,3319 h60
  text "2" at -987.42,3199 h60
  text "L2" at -577.51,3199 h60
  text "FR-4" at 352.23,3199 h60
  text "0.041mm" at 1212,3199 h60
  text "Dielectric 1" at -577.51,3079 h60
  text "Core-042" at 352.23,3079 h60
  text "4.600mm" at 1212,3079 h60
  text "4.6" at 1861.84,3079 h60
  text "3" at -987.42,2959 h60
  text "L3" at -577.51,2959 h60
  text "FR-4" at 352.23,2959 h60
  text "0.041mm" at 1212,2959 h60
  text "Dielectric 3" at -577.51,2839 h60
  text "PP-022" at 352.23,2839 h60
  text "0.102mm" at 1212,2839 h60
  text "4.6" at 1861.84,2839 h60
  text "4" at -987.42,2719 h60
  text "L4" at -577.51,2719 h60
  text "FR-4" at 352.23,2719 h60
  text "0.030mm" at 1212,2719 h60
  text "Bottom Solder" at -577.51,2599 h60
  text "Solder Resist" at 352.23,2599 h60
  text "0.030mm" at 1212,2599 h60
  text "3.5" at 1861.84,2599 h60
  text "Bottom Overlay" at -577.51,2479 h60
  text "Total board thickness:" at -987.42,2359 h60
  text "5.326mm" at 1212,2359 h60
  text "-" at 1656.42,1519 h50 r90
  text "+" at 1614,1455 h50
  text "PEPOYA.ir" at 2149,835 h30 r90
Bottom Overlay:
  drawing of 5 lines, arcs and shapes, not listed
  text "BL+" at 2379,1819 h30
  text "BL-" at 2118,1815 h30
  text "LEOPARD" at 1157,1741.32 h150
  text "HD5" at 1015.83,1623 h100
  text "94V- 0" at 1472,105.7 h60
  text "2024" at 1489,13 h103.32
Bottom Solder:
  rectangle: 2230,1643 2283,1817
  rectangle: 2157,1643 2212,1819
  rectangle: 16,654 64,999

## Text inside footprints (layer, text, board x,y; h text height)
C3: Top Overlay "+" at 841.25,490.86 h60 r270
C27: Top Overlay "+" at 1795.14,1091.25 h60
EDID: Top Overlay "SDA" at 366,1427 h39.37 r90; Top Overlay "SCL" at 268,1428 h39.37 r90; Top Overlay "GND" at 162,1424 h39.37 r90; Top Overlay "+5" at 67,1425 h39.37 r90
M1: Bottom Overlay "KEY" at 1477,1439 h39.37 r90; Bottom Overlay "MUTE" at 1577,1479 h39.37 r90; Bottom Overlay "VCC" at 1672,1434 h39.37 r90; Bottom Overlay "GND" at 1772,1434 h39.37 r90; Bottom Overlay "L" at 1862,1419 h39.37 r90; Bottom Overlay "R" at 1967,1419 h39.37 r90